# Altium PCB PogoPinPadSide.PcbDoc
Units mil, origin at the board's own origin, x right, y up, seen from the top; angles counter-clockwise.
Board outline 2259.98 x 1967.18 mil, 2 copper layers (Top Layer, Bottom Layer); 17 components, 16 nets, 37 pads, 61 vias.
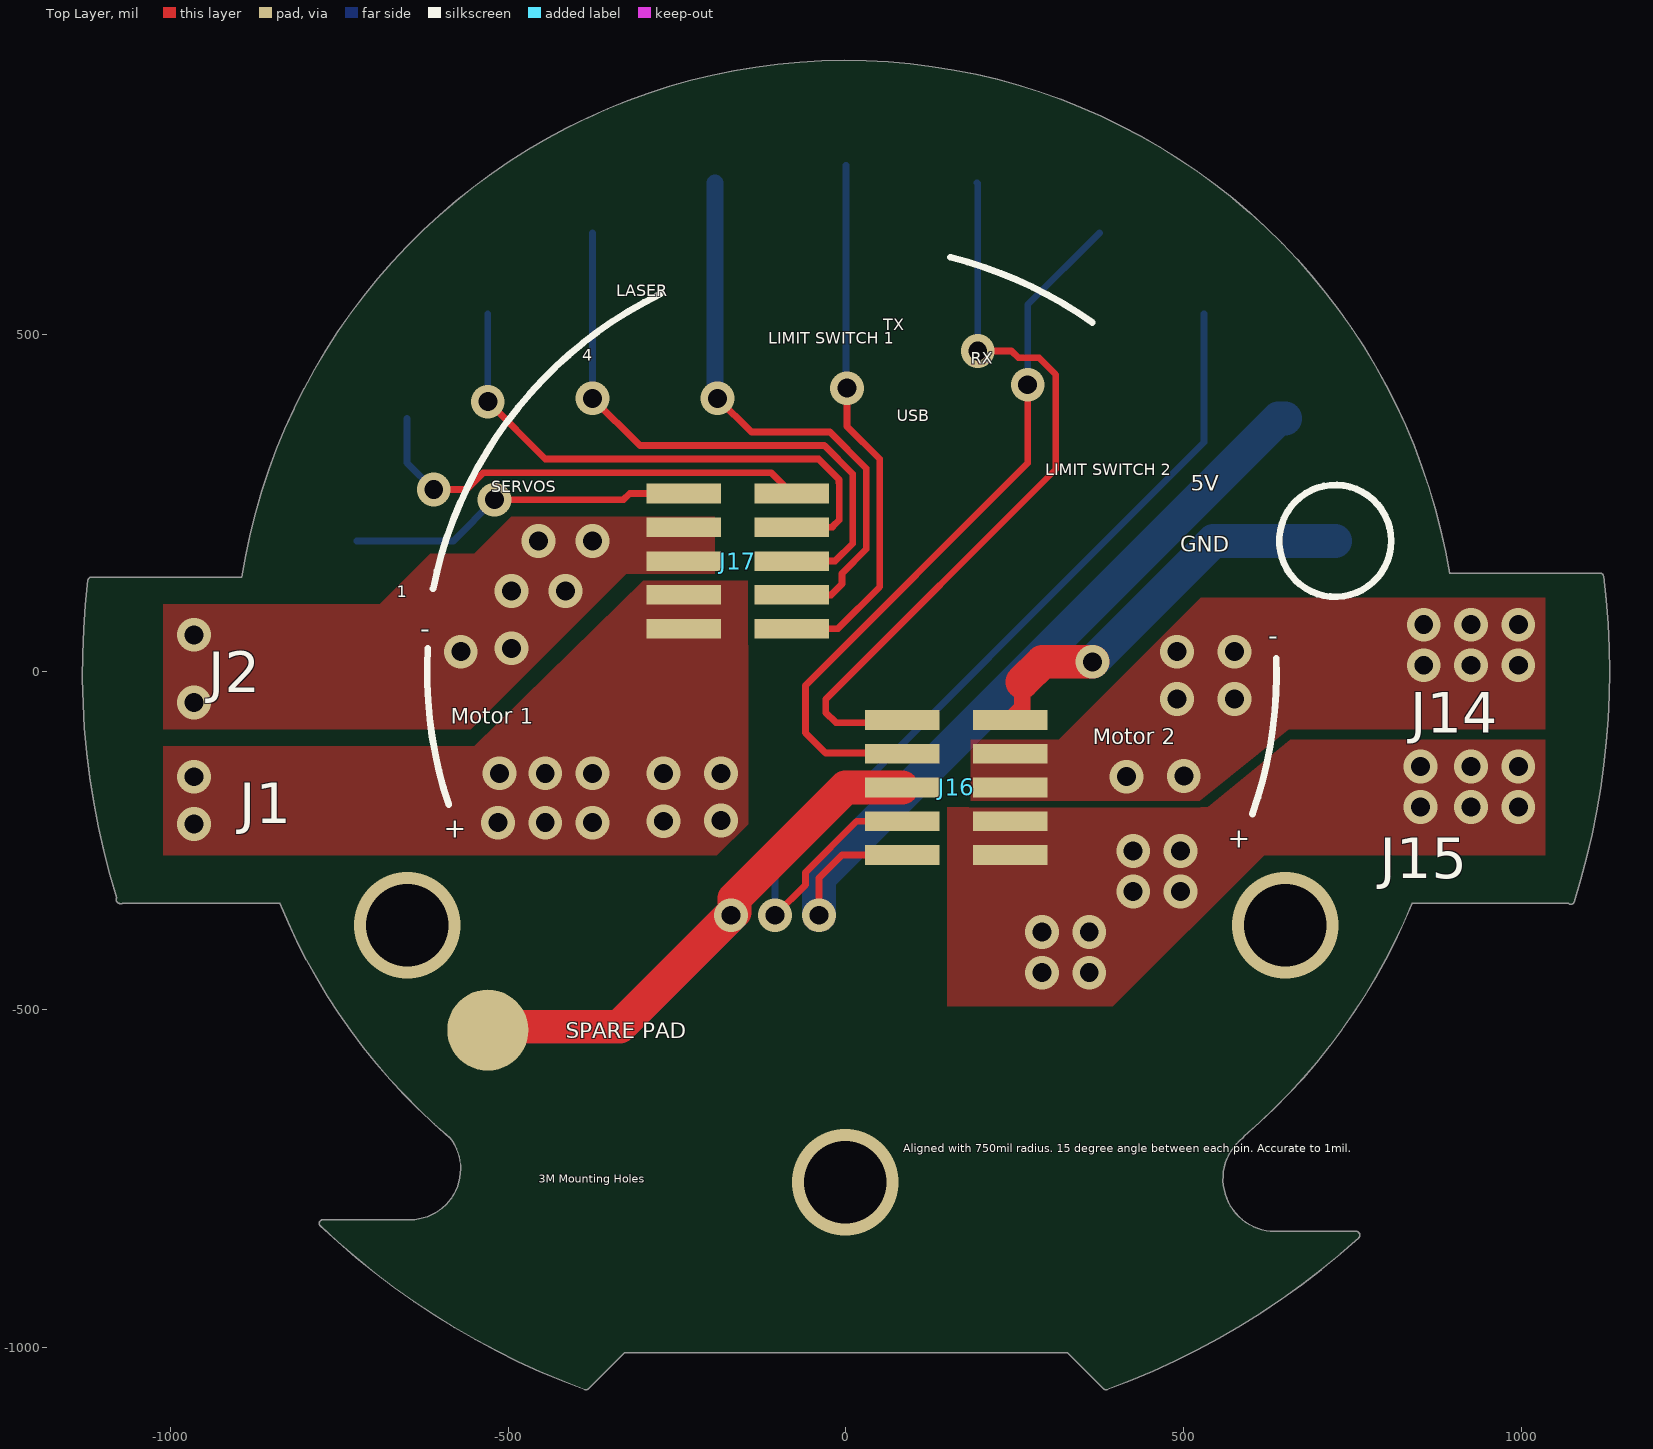
[diagram p0: Top Layer view]
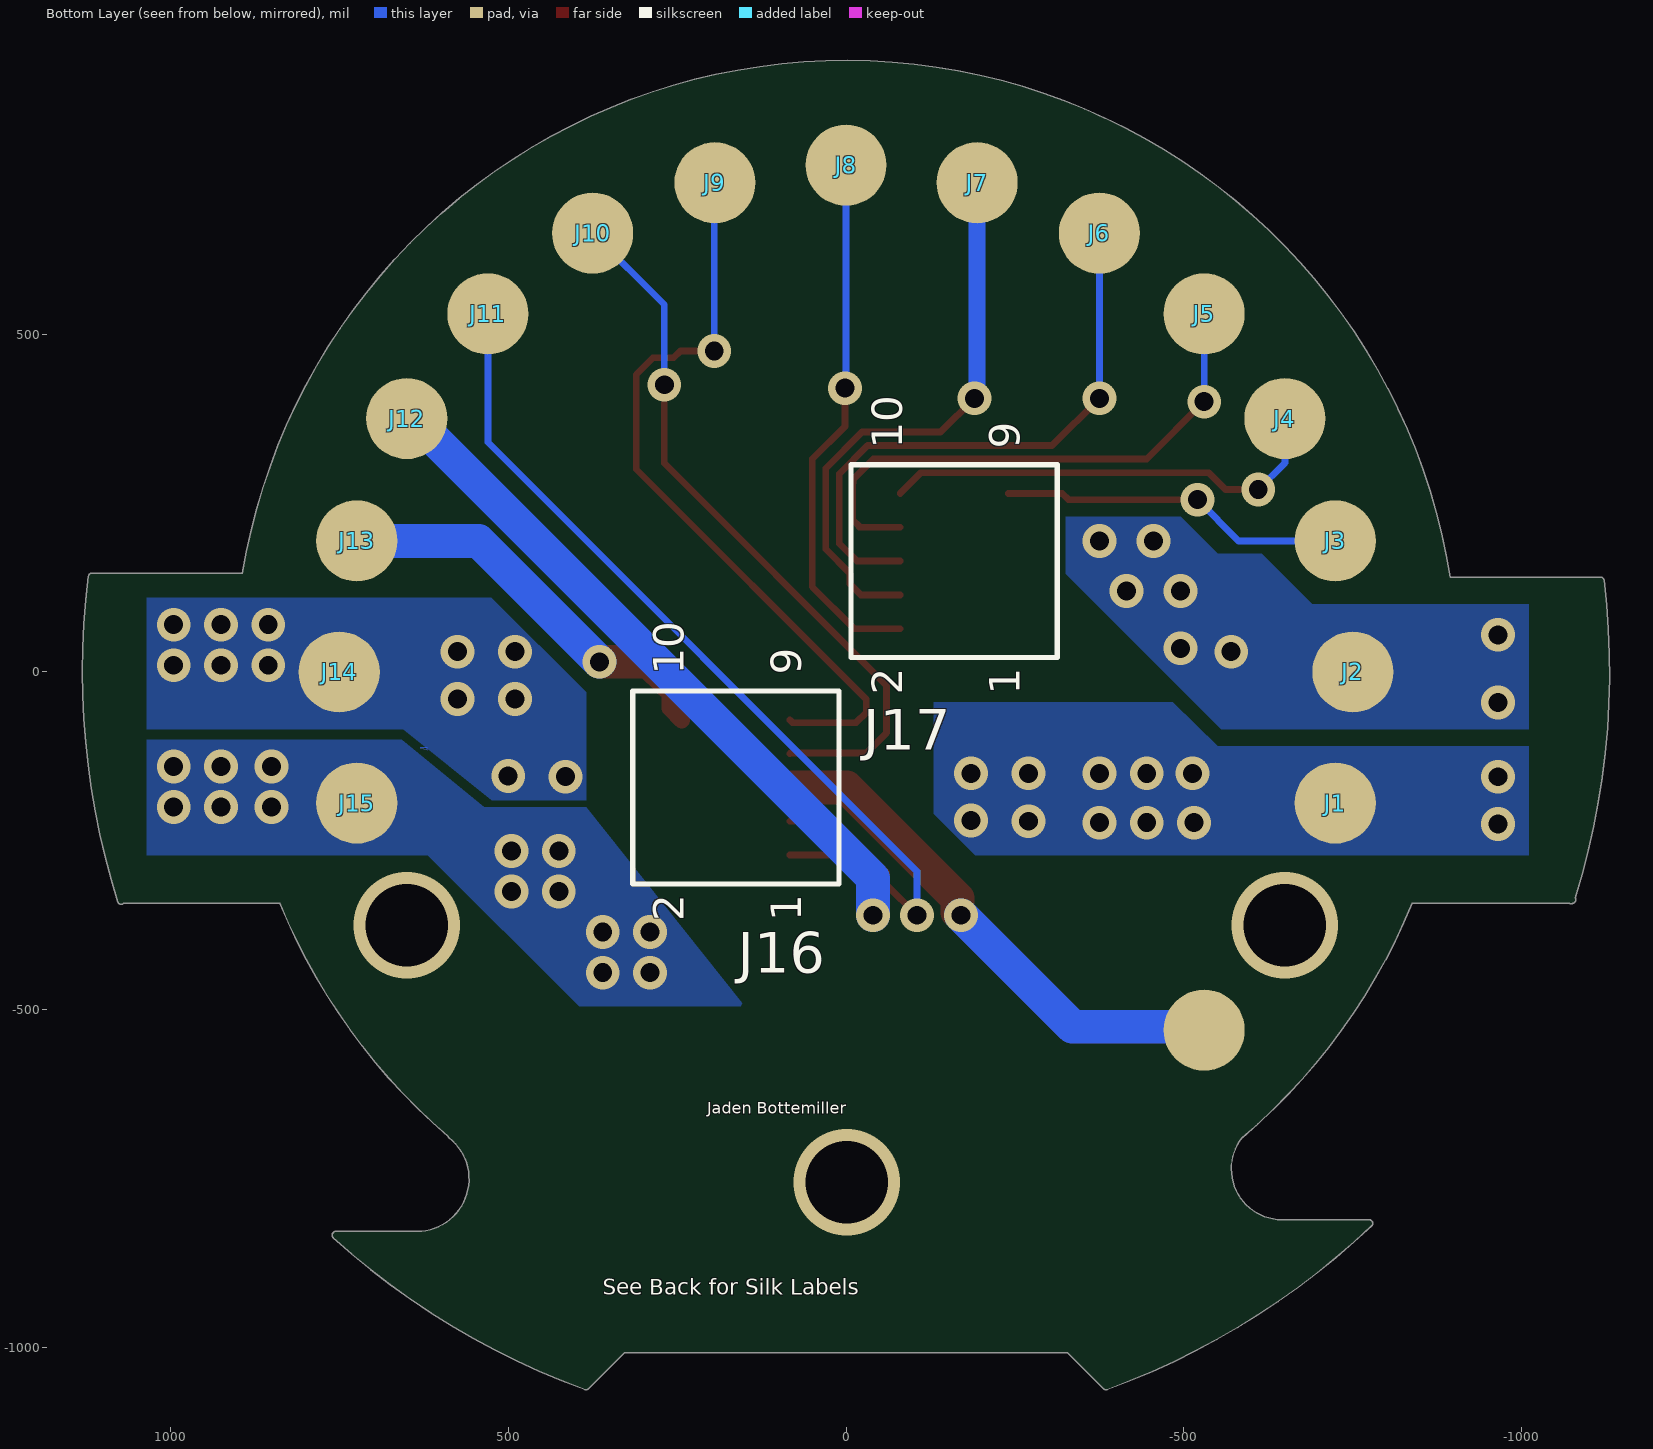
[diagram p1: Bottom Layer view, seen from below]

## Layer stack, top to bottom
Top Solder: solder mask 0.4, Solder Resist, Dk 3.5
Top Layer: signal copper 1.4
Dielectric 1: dielectric 12.6, FR-4, Dk 4.8
Bottom Layer: signal copper 1.4
Bottom Solder: solder mask 0.4, Solder Resist, Dk 3.5

## Board outline
-778,-819.55 cw(c-774.54,-815.91) -778.07,-812.34 cw(c-774.32,-815.68) -774.32,-810.66 -645.4,-810.66 cw(c-645.4,-815.68) -645.19,-810.67 cw(c-644.96,-815.68) -644.98,-810.66 ccw(c-645.4,-735.47) -570.21,-735.47 ccw(c-645.4,-735.47) -585.61,-689.88 cw(c-583.18,-685.49) -586.43,-689.31 cw(c0,0) -837.84,-342.16 -1070.07,-342.16 cw(c-1073,-338.09) -1076.08,-342.04 cw(c-1075,-337.15) -1079.33,-334.62 cw(c0,0) -1121.82,135.83 cw(c-1116.84,135.22) -1116.84,140.24 -894.49,140.24 cw(c-894.49,135.22) -894.09,140.22 cw(c0,0) 893.19,145.81 1114.28,145.81 cw(c1116.11,141.14) 1121.09,141.77 cw(c0,0) 1130.02,0 cw(c0,0) 1077.52,-340.42 cw(c1072.74,-338.91) 1069.17,-342.44 1069.19,-342.46 1068.89,-342.16 837.84,-342.16 cw(c0,0) 589.13,-687.01 cw(c584.34,-685.51) 587.44,-689.46 ccw(c635.34,-750.34) 634.88,-827.8 ccw(c635.34,-750.34) 634.89,-827.8 ccw(c635.34,-750.34) 634.91,-827.8 634.88,-827.8 755,-827.8 cw(c755,-832.82) 759,-829.79 cw(c755.6,-833.48) 760.62,-833.48 cw(c755.6,-833.48) 758.97,-837.2 cw(c0,0) 386.49,-1061.87 cw(c384.77,-1057.15) 381.21,-1060.68 381.23,-1060.7 327.92,-1007.4 -327.92,-1007.4 -381.23,-1060.7 -381.21,-1060.68 cw(c-384.77,-1057.15) -386.49,-1061.87 cw(c0,0)

## Design rules (kind name [scope] priority, off if disabled: settings)
Clearance [All] p1: gap=10 ignorepadtopadclearanceinfootprint=FALSE except(0: Arc-Hole Track-Hole SMDPad-Hole THPad-Hole Via-Hole Fill-Hole Poly-Hole Region-Hole Text-Hole)
HoleSize [All] p1: absolutevalues=TRUE maxlimit=150 minlimit=1 maxpercent=80.000 minpercent=20.000
PolygonConnect [All] p1: connectstyle=Direct reliefconductorwidth=10 reliefentries=4 polygonreliefangle="90 Angle" airgapwidth=10
RoutingVias [All] p1: holewidth=28 width=50 viastyle="Through Hole" minholewidth=28 minwidth=50 maxholewidth=28 maxwidth=50
SolderMaskExpansion [All] p1: expansion=4
Width [All] p1: maxlimit=500 minlimit=10 preferedwidth=10 minimp=50.000000 maximp=50.000000 favimp=50.000000
29 further rules are at their usual default settings.

## Components (designator, comment, footprint, x,y, rotation, side; value= is the part's Value field where it differs from the comment)
J1 "PogoPinPad" PCBComponent_1#1 1240,-930 r0 top
J2 "PogoPinPad" PCBComponent_1#2 2685,175 r0 top
J3 "PogoPinPad" PCBComponent_1#3 -710,410 r0 top
J4 "PogoPinPad" PCBComponent_1#4 -515,550 r0 top
J5 "PogoPinPad" PCBComponent_1#5 -260,645 r0 top
J6 "PogoPinPad" PCBComponent_1#6 60,655 r0 top
J7 "PogoPinPad" PCBComponent_1#7 385,420 r0 top
J8 "PogoPinPad" PCBComponent_1#8 675,55 r0 top
J9 "PogoPinPad" PCBComponent_1#9 745,-220 r0 top
J10 "PogoPinPad" PCBComponent_1#10 645,-500 r0 top
J11 "PogoPinPad" PCBComponent_1#11 345,-710 r0 top
J12 "PogoPinPad" PCBComponent_1#12 -45,-665 r0 top
J13 "PogoPinPad" PCBComponent_1#13 -465,-590 r0 top
J14 "PogoPinPad" PCBComponent_1#14 730,-50 r0 top
J15 "PogoPinPad" PCBComponent_1#15 2510,175 r0 top
J16 "10-Pin Std Conn" FTSH-105-01-F-DV 173.24,-180 r90 bottom
J17 "10-Pin Std Conn" FTSH-105-01-F-DV -150,155 r90 bottom

## Footprints (in the part's own frame and the unit in brackets; to place one, negate y for a bottom-side part, rotate by r counter-clockwise, add the part's x,y. Pads: shape width x height; smd on the part's side, far side on the other; paste and mask are expansions set on the pad)
FTSH-105-01-F-DV [mm]
  rect 0.74x2.79 smd far side: 1(-2.31,-2.289) 2(-2.31,1.775) 3(-1.04,-2.289) 4(-1.04,1.775) 5(0.23,-2.289) 6(0.23,1.775) 7(1.5,-2.289) 8(1.5,1.775) 9(2.77,-2.289) 10(2.77,1.775)
  silkscreen extent -3.4,-4.14 3.86,3.62
PCBComponent_1#1 [mil]
  round 120 smd far side: 1(-1964,736)
PCBComponent_1#2 [mil]
  round 120 smd far side: 1(-3435,-175)
PCBComponent_1#3 [mil]
  round 120 smd far side: 1(-14,-216)
PCBComponent_1#4 [mil]
  round 120 smd far side: 1(-134.5,-175)
PCBComponent_1#5 [mil]
  round 120 smd far side: 1(-270,-115)
PCBComponent_1#6 [mil]
  round 120 smd far side: 1(-435,-5.5)
PCBComponent_1#7 [mil]
  round 120 smd far side: 1(-579,304)
PCBComponent_1#8 [mil]
  round 120 smd far side: 1(-675,695)
PCBComponent_1#9 [mil]
  round 120 smd far side: 1(-551,944)
PCBComponent_1#10 [mil]
  round 120 smd far side: 1(-270,1149.5)
PCBComponent_1#11 [mil]
  round 120 smd far side: 1(185,1240)
PCBComponent_1#12 [mil]
  round 120 smd far side: 1(695,1040)
PCBComponent_1#13 [mil]
  round 120 smd far side: 1(1189,784)
PCBComponent_1#14 [mil]
  round 120 smd far side: 1(20,50)
PCBComponent_1#15 [mil]
  round 120 smd far side: 1(-1786,-369)

## Free pads (board coordinates)
  round 120 smd far side: S(-530,-530)
  round 120 smd: S(-530,-530)

## Via types
v1: diameter 50, hole 28, Top Layer to Bottom Layer, 58 vias
v2: diameter 157.48, hole 122.05, Top Layer to Bottom Layer, 3 vias

## Nets (pads, with @x,y where several pads share a name; then routed paths per layer and width w, separated by ;. In a path a pad name is that pad's centre, name@x,y a point inside that pad or via, vN(x,y) a via of type N, cw(c..) or ccw(c..) an arc to the next point about the centre after c; other vN are vias at no path point)
5V: J12.1 J16.1 | length 1218.8
  Top Layer w10: v1(-40,-360) -40,-305 -5.94,-270.94 J16.1
  Bottom Layer w50: v1(-40,-360) -40,-305.15 640.15,375 J12.1
GND: J13.1 J16.10 | length 613.1
  Top Layer w25: J16.10 260.77,-53.29 260.77,-15
  Top Layer w50: 260.77,-15 290.77,15 v1(365,15)
  Bottom Layer w50: v1(365,15) 544,194 J13.1
LASER: J7.1 J17.4 | length 856.2
  Top Layer w10: v1@-194,409 v1(-190,405) -140,355 -23.8,355 30,301.2 30,181.72 -5.94,145.77 -5.94,130 -21.89,114.06 J17.4
  Bottom Layer w10: v1@-194,409 v1(-190,405)
  Bottom Layer w25: v1@-194,409 J7.1
LIM1: J8.1 J17.2 | length 801.2
  Top Layer w10: J17.2 -11.89,64.06 50,125.94 50,315 1.57,363.43 v1(1.57,420)
  Bottom Layer w10: J8.1 0,420.85 1.21,419.64 v1(1.57,420)
LIM2: J11.1 J16.3 | length 1416.5
  Top Layer w10: v1(-105,-360) -60,-315 -60,-296.72 15.77,-220.94 J16.3
  Bottom Layer w10: v1@-100,-355 v1(-105,-360) -105,-295 530,340 J11.1
MOTOR1+: J1.1 J17.1 J17.3
  other v1: -965,-225 -515,-223.02 -445,-223.02 -375,-223.02 -270,-220.92 -185,-220 -965,-155 -512.65,-150 -445,-150 -375,-150 -270,-150 -185,-150
MOTOR1-: J2.1 J17.5 J17.7
  other v1: -965,-45 -570,30 -495,35 -965,55 -495,120 -415,120 -455,194 -375,194
MOTOR2+: J15.1 J16.2 J16.4
  other v1: 290,-445 360,-445 290,-385 360,-385 425,-325 495,-325 425,-265 495,-265 850,-200 925,-200 995,-200 850,-140 925,-140 995,-140
MOTOR2-: J14.1 J16.6 J16.8
  other v1: 415,-154.92 500,-154 490,-40 575,-40 855,10 925,10 995,10 490,30 575,30 855,70 925,70 995,70
SERVO1: J3.1 J17.9 | length 541.5
  Top Layer w10: v1@-520,245 v1(-520,255) -329.06,255 -320,264.06 J17.9
  Bottom Layer w10: J3.1 -581,194 v1(-520,255) -516.89,255 -506.89,265 v1@-505.94,264.06
SERVO2: J4.1 J17.10 | length 674.4
  Top Layer w10: v1(-610,270) -561.57,270 -536.57,295 -111.06,295 J17.10
  Bottom Layer w10: J4.1 -649.5,309.5 v1(-610,270)
SERVO3: J5.1 J17.8 | length 832.6
  Top Layer w10: v1(-530,400) -445,315 -40.36,315 -10.2,284.83 -10.2,280.2 -10,280 -10,225 -20,215 -20,214.06 J17.8
  Bottom Layer w10: v1(-530,400) J5.1
SERVO4: J6.1 J17.6 | length 879.7
  Top Layer w10: v1(-375,405) -305,335 -32.08,335 10,292.92 10,190 -15.94,164.06 J17.6
  Bottom Layer w10: v1(-375,405) J6.1
SPARE: J16.5 pad.S | length 1203.9
  Top Layer w10: pad.S@-530,-530 pad.S@-525,-525
  Top Layer w50: pad.S@-525,-525 -335,-525 v1(-170,-360) -165,-355 -165,-335.15 -0.8,-170.94 J16.5
  Bottom Layer w50: pad.S@-530,-530 -525,-525 -335,-525 v1(-170,-360)
USBRX: J10.1 J16.7 | length 1075.6
  Top Layer w10: J16.7 82.18,-120 -30,-120 -60,-90 -60,-20 268.91,308.91 v1(268.91,425)
  Bottom Layer w10: v1(268.91,425) 268.91,543.41 J10.1
USBTX: J9.1 J16.9 | length 1155.6
  Top Layer w10: J16.9 79.07,-75 -15,-75 -30,-60 -30,-40.48 310.48,300 310.48,440 285.48,465 255,465 245,475 v1(195,475) v1@205,465
  Bottom Layer w10: J9.1 195,723 v1(195,475)
copper on no net:
  other v2: -0.8,-755 -649.5,-375 650,-375

## Polygon pours and split planes (outlines as drawn)
MOTOR2- on Bottom Layer "Bottom Layer-MOTOR2-" (solid, pour order 32): 384.77,-190.47 384.77,-30.23 525,110 1035,110 1035,-85 655,-85 523.53,-190.47
MOTOR2+ on Bottom Layer "Bottom Layer-MOTOR2+" (solid, pour order 30): 384.77,-200 150,-495 395,-495 619.05,-270.95 1035,-270.94 1035,-100 657.22,-100 535,-200
MOTOR1- on Bottom Layer "Bottom Layer-MOTOR1-" (solid, pour order 28): -325,230 -325,145 -555,-85 -1010,-85 -1010,100 -690,100 -615,175 -550,175 -495,230
MOTOR1+ on Bottom Layer "Bottom Layer-MOTOR1+" (solid, pour order 26): -483.67,-45 -130,-45 -130,-209.98 -190.94,-271 -1010,-271 -1010,-110 -550,-110
no net on Bottom Layer "Bottom Layer-No Net" (solid, pour order 2): 620,-115 620,-112.5 630,-112.5
MOTOR2- on Top Layer "Bottom Layer-MOTOR2-" (solid, pour order 0): 185,-190.47 185,-100 315,-100 525,110 1035,110 1035,-85 655,-85 523.53,-190.47
MOTOR2+ on Top Layer "Bottom Layer-MOTOR2+" (solid, pour order 4): 150,-200 150,-495 395,-495 619.05,-270.95 1035,-270.94 1035,-100 657.22,-100 535,-200
MOTOR1- on Top Layer "Bottom Layer-MOTOR1-" (solid, pour order 8): -194,230 -194,145 -325,145 -555,-85 -1010,-85 -1010,100 -690,100 -615,175 -550,175 -495,230
MOTOR1+ on Top Layer "Bottom Layer-MOTOR1+" (solid, pour order 6): -300,135 -145,135 -145,-225 -190.94,-271 -1010,-271 -1010,-110 -550,-110

## Silkscreen, mask and mechanical layers (free items; w line width, h text height)
Top Overlay:
  circle w10: c724,194 r82.81
  lines w10: -618.85,34.94 ccw(c0,0) -588.03,-196.01 ; -611.03,123.15 cw(c0,0) -274.6,559.57 ; 154.84,613.62 cw(c0,0) 364.57,517.29 ; 601.5,-210.28 ccw(c0,0) 636.89,20.06
  text "LASER" at -340,550 h30
  text "TX" at 55,500 h30
  text "LIMIT SWITCH 1" at -115,480 h30
  text "4" at -390,455 h30
  text "RX" at 185,450 h30
  text "USB" at 75,365 h30
  text "LIMIT SWITCH 2" at 295,285 h30
  text "SERVOS" at -525,260 h30
  text "5V" at 510,260 h40
  text "GND" at 495,170 h40
  text "1" at -665,105 h30
  text "-" at -630,40 h50
  text "-" at 625,30 h50
  text "Motor 1" at -585,-85 h40
  text "Motor 2" at 365,-115 h40
  text "+" at -595,-255 h50
  text "+" at 565,-270 h50
  text "SPARE PAD" at -415,-550 h40
  text "Aligned with 750mil radius. 15 degree angle between each pin. Accurate to 1mil." at 85,-715 h20
  text "3M Mounting Holes" at -455,-760 h20
Bottom Overlay:
  text "Jaden Bottemiller" at 205,-660 h30
  text "See Back for Silk Labels" at 360,-930 h40
Mechanical 1:
  lines w10: -1075,-337.15 -834.47,-337.15 ccw(c0,0) -583.18,-685.49 ; -1073,-338.09 cw(c0,0) -1116.84,135.22 -894.49,135.22 ; -889.89,134.53 cw(c0,0) 888.92,140.79 1115,140.79 ; -774.54,-815.91 ccw(c0,0) -384.77,-1057.15 -330,-1002.38 330,-1002.38 384.77,-1057.15 ccw(c0,0) 755.6,-833.48 ; -774.32,-815.68 -645.4,-815.68 ; -644.96,-815.68 ccw(c-645.4,-735.47) -582.92,-685.19 ; 312,312.5 312.5,-312.5 -312.5,-312.5 -312.5,312.5 312.5,312.5 ; 583.84,-684.93 ccw(c0,0) 834.47,-337.15 1070.97,-337.15 1072.74,-338.91 ccw(c0,0) 1116.11,141.14 ; 584.34,-685.51 ccw(c635.34,-750.34) 634.88,-832.82 755,-832.82

## Text inside footprints (layer, text, board x,y; h text height)
J16: Bottom Overlay "10" at 225.13,-4.36 h77.5 r270; Bottom Overlay "9" at 51.11,-4.36 h77.5 r270; Bottom Overlay "2" at 225.13,-369.01 h77.5 r270; Bottom Overlay "1" at 51.11,-369.01 h77.5 r270; Mechanical 16 "9" at 51.11,-4.36 h77.5 r270; Mechanical 16 "10" at 225.13,-4.36 h77.5 r270; Mechanical 16 "1" at 51.11,-369.01 h77.5 r270; Mechanical 16 "2" at 225.13,-369.01 h77.5 r270
J17: Bottom Overlay "10" at -98.11,330.64 h77.5 r270; Bottom Overlay "9" at -272.13,330.64 h77.5 r270; Bottom Overlay "2" at -98.11,-34.01 h77.5 r270; Bottom Overlay "1" at -272.13,-34.01 h77.5 r270; Mechanical 16 "9" at -272.13,330.64 h77.5 r270; Mechanical 16 "10" at -98.11,330.64 h77.5 r270; Mechanical 16 "1" at -272.13,-34.01 h77.5 r270; Mechanical 16 "2" at -98.11,-34.01 h77.5 r270